# Altium PCB Power.PcbDoc
Units mm, origin at the board's own origin, x right, y up, seen from the top; angles counter-clockwise.
Board outline 152.4 x 101.6 mm, 2 copper layers (Top Layer, Bottom Layer); 31 components, 11 nets, 104 pads, 38 vias.
Unrouted connection lines stored in the file: 2.
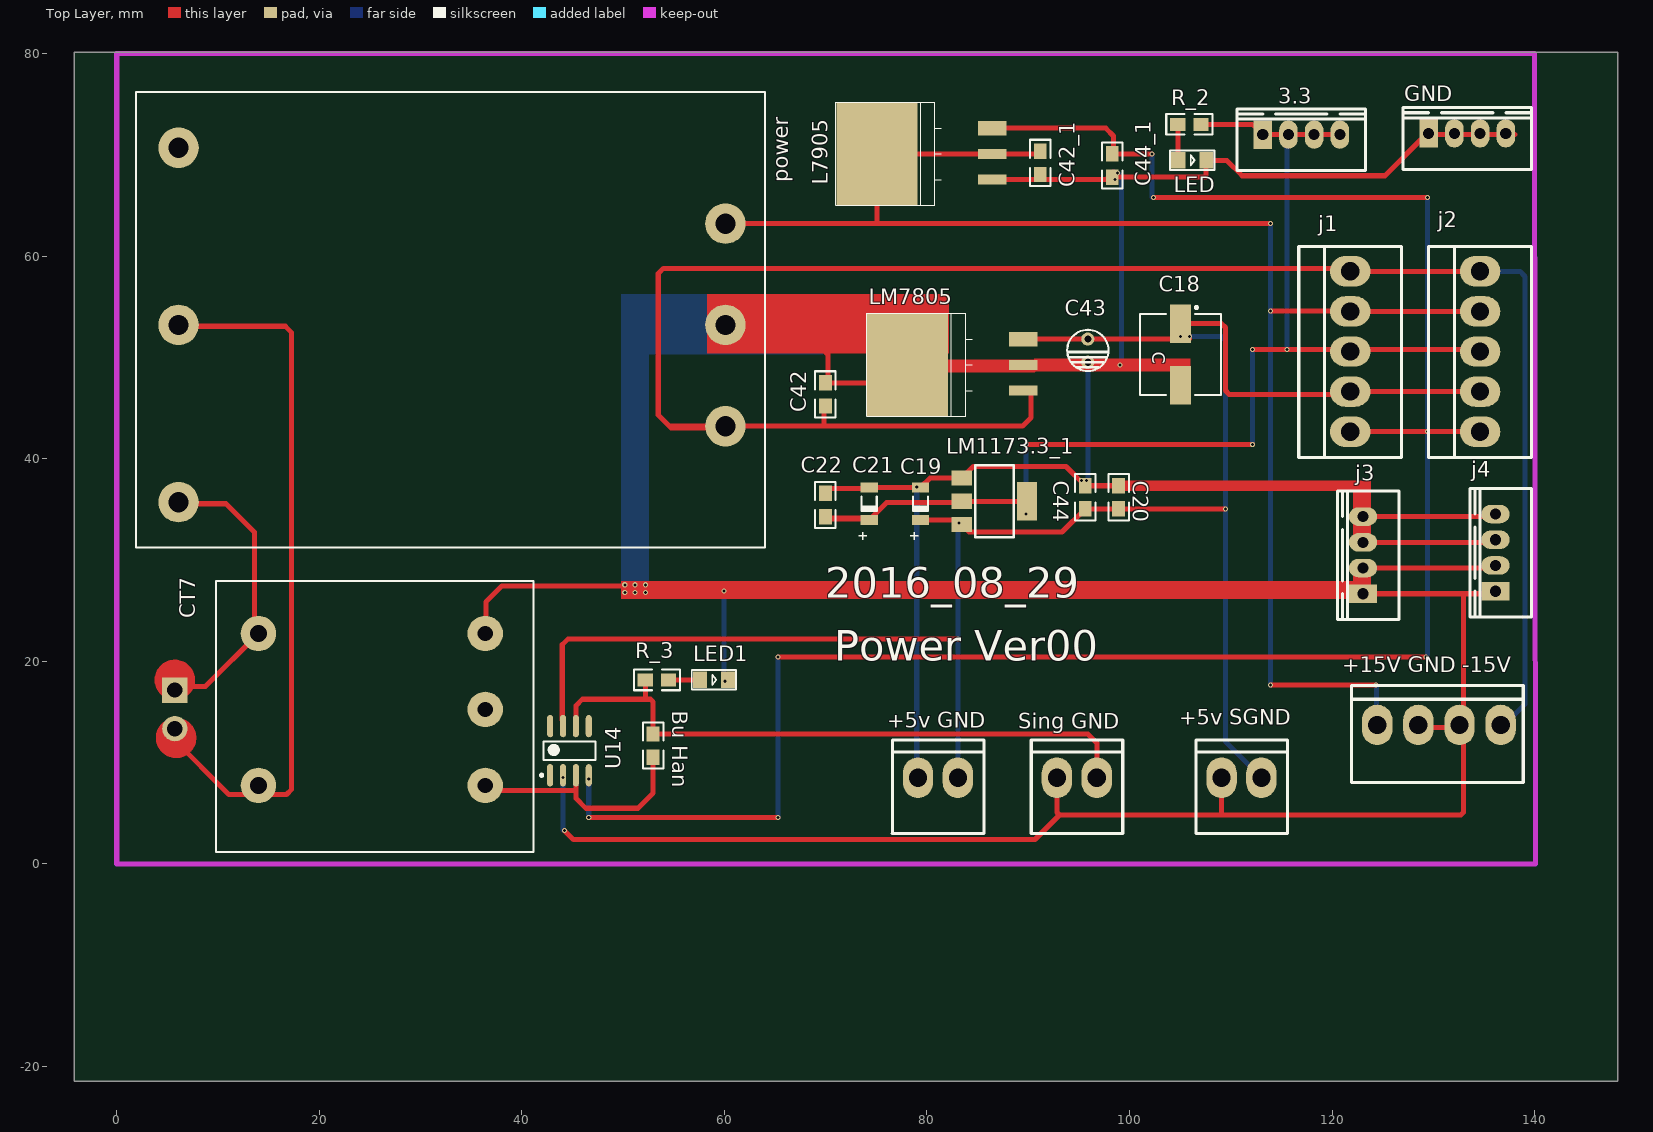
[diagram p0: Top Layer view]
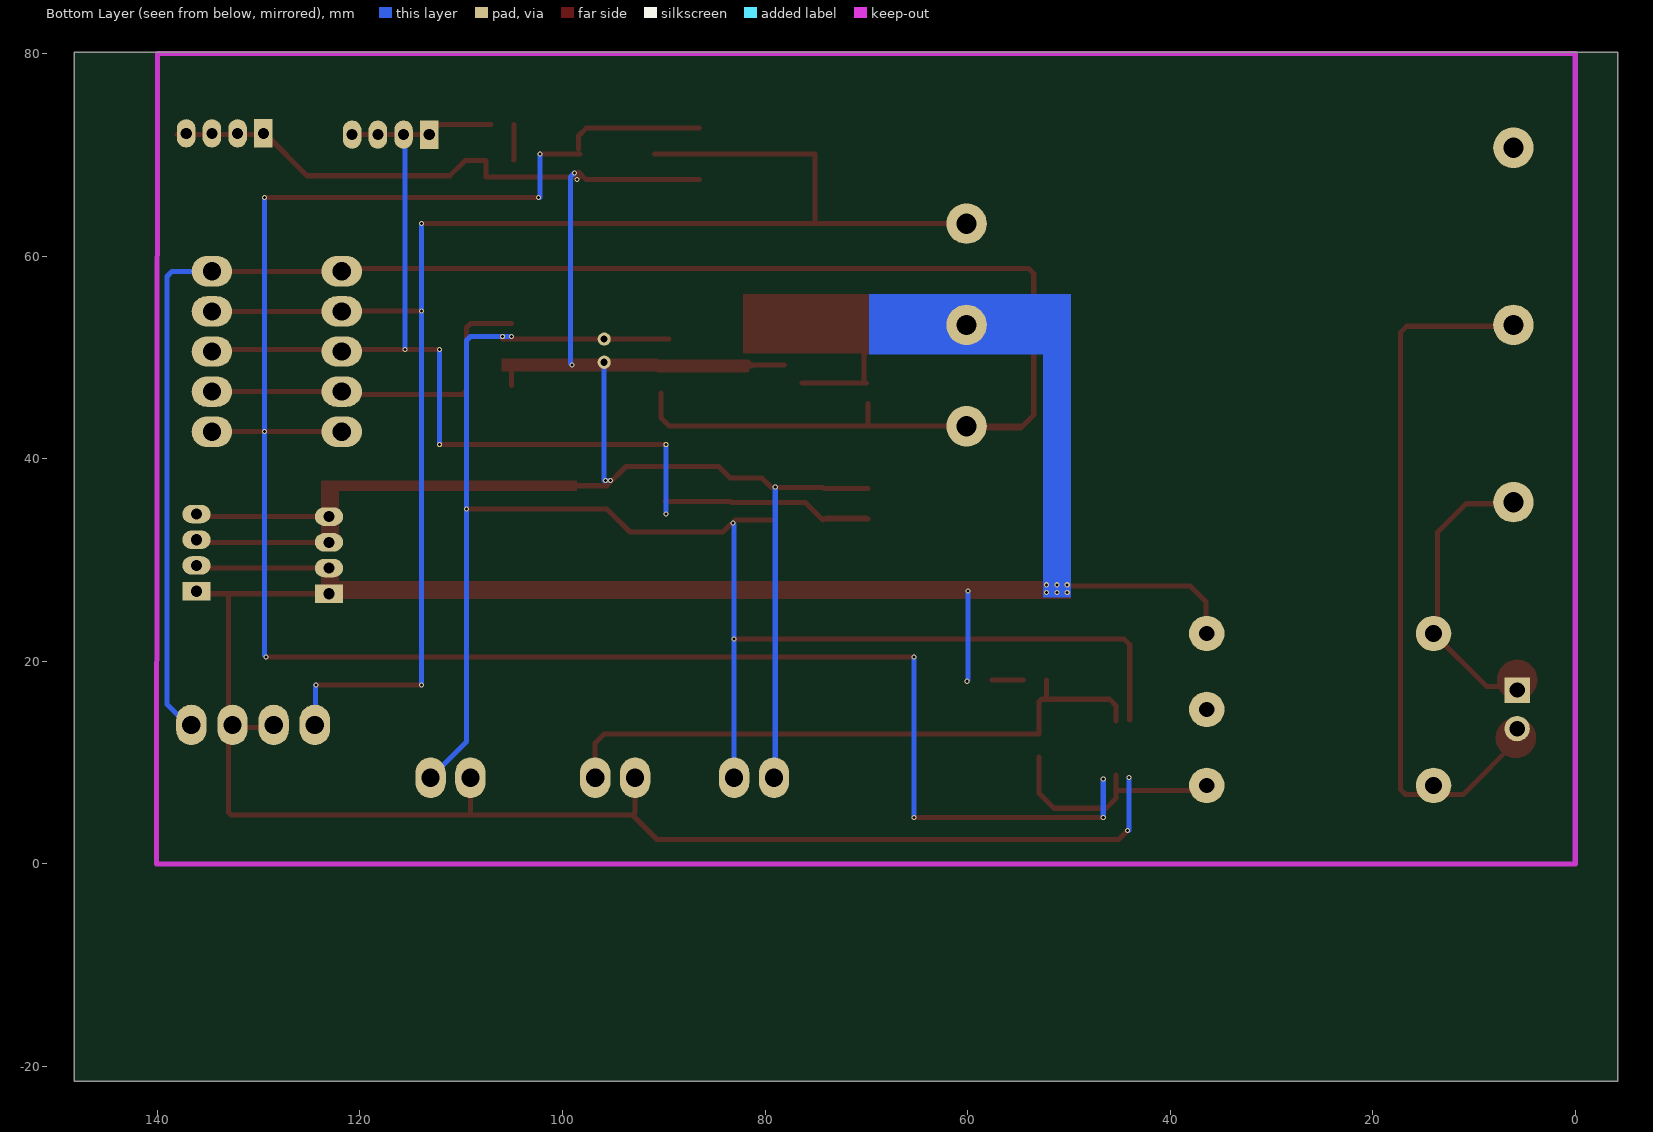
[diagram p1: Bottom Layer view, seen from below]

## Layer stack, top to bottom
Top Layer: signal copper 0.0356
Dielectric: dielectric 0.32, FR-4, Dk 4.8
Bottom Layer: signal copper 0.0356

## Board outline
-4.191,-21.463 148.209,-21.463 148.209,80.137 -4.191,80.137

## Design rules (kind name [scope] priority, off if disabled: settings)
Clearance [All] p1: gap=0.254
PolygonConnect [All] p1: connectstyle=Relief reliefconductorwidth=0.254 reliefentries=4 polygonreliefangle="90 Angle"
RoutingVias [All] p1: holewidth=0.711 width=1.27 viastyle="Through Hole" minholewidth=0.711 minwidth=1.27 maxholewidth=0.711 maxwidth=1.27
SilkscreenOverComponentPads [All] p1: minsilkscreentomaskgap=0.254
SolderMaskExpansion [All] p1: expansion=0.102
TestPointUsage [All] p1: valid=0 allowmultiple=FALSE
Testpoint [All] p1: side=15 testpointundercomponent=TRUE minsize=1.016 maxsize=2.54 preferedsize=1.524 minholesize=0 maxholesize=1.016 preferedholesize=0.813 testpointgrid=0.025 style=1023 order=0123456789
Width [All] p1: maxlimit=1 minlimit=0.2 preferedwidth=0.254 minimp=50.000000 maximp=50.000000 favimp=50.000000
23 further rules are at their usual default settings.

## Components (designator, comment, footprint, x,y, rotation, side; value= is the part's Value field where it differs from the comment)
3.3 "CON4" CON4 113.157,72.009 r0 top
"+5v GND" "CON2" CON2/0.4 79.121,8.509 r0 top
"+5v SGND" "CON2" CON2/0.4 109.093,8.509 r0 top
"+15V GND -15V" "CON4" CON4/0.4 124.46,13.716 r0 top
"Bu Han" "0K" 0805 52.959,10.541 r90 top
C18 "220u" C-RVE 105.029,50.292 r270 top
C19 "10u" c-1206 79.375,35.56 r90 top
C20 "0.1" 0805 98.933,35.052 r90 top
C21 "10u" c-1206 74.295,35.56 r90 top
C22 "0.1" 0805 69.977,34.29 r90 top
C42 "0.1" 0805 69.977,45.212 r90 top
C42_1 "0.1" 0805 91.186,68.072 r90 top
C43 "220U" CD4 95.885,51.816 r90 top
C44 "0.1" 0805 95.631,35.052 r90 top
C44_1 "0.1" 0805 98.298,70.104 r270 top
CT7 "CT09" TRA1 24.384,14.224 r270 top
GND "CON4" CON4 129.54,72.136 r0 top
j1 "CON5" CON5/0.4 121.793,42.672 r90 top
j2 "CON5" CON5/0.4 134.62,42.672 r90 top
j3 "CON4" CON4 123.063,26.67 r90 top
j4 "CON4" CON4 136.144,26.924 r90 top
L7905 "LD1086D2M33" D2PAK/A 75.057,70.104 r0 top
LED "0K" LED_贴_1 105.029,69.469 r0 top
LED1 "0K" LED_贴_1 57.785,18.161 r0 top
LM1173.3_1 "LM1117-33" SOT223 83.439,38.1 r270 top
LM7805 "LD1086D2M33" D2PAK/A 78.105,49.276 r0 top
power "Power" POWER 6.1,53.217 r180 top
R_2 "0K" 0805 107.061,73.025 r180 top
R_3 "0K" 0805 52.197,18.161 r0 top
"Sing GND" "CON2" CON2/0.4 92.837,8.509 r0 top
U14 "OP07CP" SOP127P600X175-8N 44.704,11.176 r90 top

## Footprints (in the part's own frame and the unit in brackets; to place one, negate y for a bottom-side part, rotate by r counter-clockwise, add the part's x,y. Pads: shape width x height; smd on the part's side, far side on the other; paste and mask are expansions set on the pad)
0805 [mil]
  rect 60x50 smd: 1(0,0) 2(90,0)
  silkscreen extent -45,-40 135,40
c-1206 [mm] "Chip Inductor, 2-Leads, Body 3.2x1.6mm, IPC Medium Density"
  rect 1x1.7 smd: 1(-1.6,0) 2(1.6,0)
  silkscreen extent -3.56,-0.75 0.7,1.02, body extent -1.6,-0.8 1.6,0.8, height 0.6
C-RVE [mm] "Precision Wire Wound Inductor, 2-Leads, Body 8.0x8.0mm, IPC Medium Density"
  rect 3.8x2.05 smd: 1(-3.048,0) 2(3.048,0)
  silkscreen extent -4.77,-4 4,4, body extent -4,-4 4,4, height 10.3
CD4 [mm]
  round 1.3 hole 0.7: 1(0,0) 2(-2.286,0)
  silkscreen extent -3.16,-2.04 0.92,2.04
CON2/0.4 [mm]
  oval 3x4 hole 1.8: 1(0,0) 2(3.937,0)
  silkscreen extent -2.54,-5.51 6.5,3.71
CON4 [mil]
  rect 72x110 hole 43.31: 1(0,0)
  oval 72x110 hole 43.31: 2(100,0) 3(200,0) 4(300,0)
  silkscreen extent -100,-140 400,100
CON4/0.4 [mm]
  oval 3x4 hole 1.8: 1(0,0) 2(4.064,0) 3(8.128,0) 4(12.192,0)
  silkscreen extent -2.54,-5.69 14.42,3.91
CON5/0.4 [mm]
  oval 3x4 hole 1.8: 1(0,0) 2(3.96,0) 3(7.92,0) 4(11.88,0) 5(15.84,0)
  silkscreen extent -2.54,-5.08 18.29,5.08
D2PAK/A [mm]
  rect 2.8x1 smd: 1(11.4,-2.54) 2(11.4,0)
  rect 8x10.2 smd: 2(0,0)
  rect 2.8x1.42 smd: 3(11.4,2.54)
  silkscreen extent -4.06,-5.08 6.35,5.08
LED_贴_1 [mm]
  rect 1.4x1.6 smd: 1(-0.207,0.013) 2(2.562,0.013)
  silkscreen extent -1.02,-0.94 3.37,0.98
POWER [mm]
  round 4 hole 2: 0(-54,-10) 1(-54,0) 2(-54,10) 3(0,-17.5) 4(0,0) 5(0,17.5)
  silkscreen extent -57.91,-23 4.19,22
SOP127P600X175-8N [mm] "SOP, 8-Leads, Body 5.1x4.0mm (max), Pitch 1.27mm, IPC Medium Density"
  oval 2.2x0.6 smd: 1(-2.425,1.905) 2(-2.425,0.635) 3(-2.425,-0.635) 4(-2.425,-1.905) 5(2.425,-1.905) 6(2.425,-0.635) 7(2.425,0.635) 8(2.425,1.905)
  silkscreen extent -2.55,-2.55 0.93,2.88, body extent -2,-2.55 2,2.55, height 1.75
SOT223 [mil]
  rect 59x79 smd: 1(0,0) 2(90.55,0) 3(181.1,0)
  rect 150x79 smd: 4(89.88,253.54)
  silkscreen extent -49,52 231,202
TRA1 [mm]
  rect 2.5x2.5 hole 1.5: 1(-2.934,-18.649)
  round 2.5 hole 1.5: 2(0.876,-18.649)
  round 3.5 hole 1.7: 3(-8.522,-10.394) 4(6.478,-10.394)
  round 3.5 hole 1.5: 5(-8.522,12.006) 6(6.478,12.006) 8(-1.022,12.006)
  Top Layer circle w2: c-3.934,-18.649 r1
  Top Layer circle w2: c1.781,-18.522 r1
  silkscreen extent -13.73,-14.59 13.04,16.78

## Part data
3.3 "+5v GND" "+5v SGND" "+15V GND -15V" GND j1 j2 j3 j4 "Sing GND": "Connector"
"Bu Han" LED LED1 R_2 R_3: library part Res2, "Resistor"
C18 C43: library part "CAPACITOR POL", "Capacitor"
C19 C21: library part Cap2, "Capacitor"
C20 C22: library part Cap, "Capacitor"
C42 C42_1 C44 C44_1: library part CAP, "Capacitor"
L7905 LM7805: library part LM1086
LM1173.3_1: library part LM1117
U14: library part OP07CN, "Very Low Offset Single Bipolar Operational Amplifier"

## Free pads (board coordinates)
  round 5 on Keep-Out: 2(3,3) 2(137,3)
  round 0.5 hole 0.3: 6(89.789,41.402) 7(112.141,41.402) 8(105.918,52.07)

## Via types
v1: diameter 0.5, hole 0.3, Top Layer to Bottom Layer, 38 vias

## Nets (pads, with @x,y where several pads share a name; then routed paths per layer and width w, separated by ;. In a path a pad name is that pad's centre, name@x,y a point inside that pad or via, vN(x,y) a via of type N, cw(c..) or ccw(c..) an arc to the next point about the centre after c; other vN are vias at no path point)
+5V: "+5v GND.2" "+5v SGND.2" C18.1 C19.1 C20.1 C43.1 C44.1 j1.2 j2.2 LM1173.3_1.3 LM7805.3 U14.7 | length 205.1
  Top Layer w0.5: U14.7@43.993,14.185 43.993,21.641 44.577,22.225 v1(83.058,22.225) ; C19.1 LM1173.3_1.3@82.979,33.96 ; LM1173.3_1.3 84.173,32.766 93.345,32.766 C44.1 C20.1 v1(109.474,35.052) ; LM7805.3 C43.1 C18.1@105.918,51.816 ; C18.1 109.093,53.34 109.474,52.959 109.474,46.736 109.855,46.355 j1.2@121.516,46.355 ; j1.2 j2.2@135.382,46.632
  Bottom Layer w0.5: 83.058,8.509 83.058,33.528 v1(83.185,33.655) ; v1(105.029,52.07) 109.093,52.07 109.474,51.689 v1(109.474,35.052) 109.474,12.065 113.03,8.509
+15V: "+15V GND -15V.4" C42.1 j1.5 j2.5 LM7805.1 power.2 | length 189.1
  Top Layer w0.5: 69.85,43.344 C42.1@69.85,45.466 ; LM7805.1@90.297,46.482 90.297,44.069 89.445,43.217 power.2 54.52,43.217 54.52,43.27 53.467,44.323 53.467,58.293 53.975,58.801 112.522,58.801 ; 112.776,58.801 112.522,58.801 ; j1.5@121.504,58.801 112.522,58.801 ; j1.5 j2.5@135.001,58.512
  Bottom Layer w0.5: j2.5@135.001,58.512 138.557,58.512 139.065,58.004 139.065,15.748 136.652,13.335 136.652,12.065
-5V: C44_1.1 j1.1 j2.1 L7905.3 U14.4 | length 210.3
  Top Layer w0.5: v1(46.609,4.572) v1(65.278,4.572) ; v1(65.278,20.447) v1(129.286,20.447) ; L7905.3 97.663,72.644 98.425,71.882 C44_1.1@98.425,70.612 ; C44_1.1 v1(102.235,70.104) ; v1(102.362,65.786) v1(129.413,65.786) ; j1.1 v1(129.413,42.672) j2.1@135.509,42.672
  Bottom Layer w0.5: v1(46.609,4.572) v1(46.609,8.382) ; v1(65.278,4.572) v1(65.278,20.447) ; v1@102.235,65.786 v1(102.235,70.104) ; v1(129.286,20.447) 129.413,20.574 v1(129.413,42.672) v1(129.413,65.786)
-15V: "+15V GND -15V.1" C42_1.2 j1.4 j2.4 L7905.2 power.0 | length 158.2
  Top Layer w0.5: power.0 75.057,63.217 ; C42_1.2@90.932,70.104 86.457,70.104 75.057,70.104 75.057,63.217 ; v1(113.919,17.653) v1(124.333,17.653) ; v1(113.919,54.61) j1.4@121.735,54.61 ; v1(113.919,63.217) 75.057,63.217 ; j1.4 j2.4@135.255,54.552
  Bottom Layer w0.5: v1(113.919,17.653) v1(113.919,54.61) 113.919,56.769 v1(113.919,63.217) ; v1(124.333,17.653) 124.409,17.678 124.409,13.36
GND: "+5v GND.1" C18.2 C19.2 C20.2 C21.2 C22.2 C42.2 C42_1.1 C43.2 C44.2 C44_1.2 GND.1 GND.2 GND.3 GND.4 j3.3 j3.4 j4.3 j4.4 L7905.1 LED.2 LM1173.3_1.1 LM7805.2 | length 208.3
  Top Layer w0.5: C22.2@69.85,37.084 C21.2@74.164,37.084 ; C42.2 LM7805.2@76.327,47.498 ; C21.2 C19.2 80.315,38.1 LM1173.3_1.1 84.582,39.243 93.726,39.243 C44.2 C20.2 ; LM7805.2@78.105,49.28 78.105,49.276 89.505,49.276 95.631,49.276 C43.2 104.267,49.53 105.029,48.768 C18.2 ; L7905.1 91.186,67.564 97.663,67.564 C44_1.2@98.425,68.326 ; C44_1.2 107.569,67.818 107.569,69.46 109.61,69.46 111.125,67.945 125.222,67.945 129.286,72.009 GND.4@138.049,72.009 ; j3.3 j4.3@136.271,31.75 ; j3.4 j4.4@136.271,34.29
  Bottom Layer w0.5: v1(78.994,37.211) 78.994,19.177 78.994,8.636 79.121,8.509 ; v1(95.25,37.846) v1(95.758,37.846) ; v1@95.885,37.846 95.885,47.371 C43.2 ; v1(98.823,68.218) 99.206,67.835 99.206,49.422 v1(99.06,49.276)
"NetBu Han_1": "Bu Han.1" CT7.2 U14.3 | length 15.3
  Top Layer w0.5: U14.3 45.364,8.726 45.364,6.452 ; 45.364,7.239 45.364,6.452 ; 52.959,10.541 52.959,6.985 51.466,5.492 46.324,5.492 45.364,6.452
NetLED1_1: LED1.1 R_3.2 | length 3.1
  Top Layer w0.5: R_3.2 LED1.1@57.566,18.161
NetLED_1: LED.1 R_2.2 | length 3.6
  Top Layer w0.5: R_2.2 104.775,69.529 LED.1
SGND: "+5v SGND.1" "+15V GND -15V.2" "+15V GND -15V.3" "Sing GND.1" CT7.1 j3.1 j3.2 j4.1 j4.2 LED1.2 power.1 U14.2 | length 206.9
  Top Layer w0.5: v1(44.196,3.302) 45.085,2.413 90.678,2.413 93.091,4.826 ; 78.736,53.217 power.1 60.1,54.512 61.595,56.007 81.915,56.007 ; 92.837,8.509 92.837,5.08 93.091,4.826 ; 109.093,8.509 109.093,4.826 ; j3.1 133.223,26.67 ; j3.2 j4.2@136.271,29.21 ; 128.651,13.462 133.223,13.462 ; j4.1@136.271,26.67 133.223,26.67 ; 93.091,4.826 109.093,4.826 ; 109.093,4.826 132.715,4.826 132.969,5.08 132.969,9.779 132.969,26.416 133.223,26.67
  Bottom Layer w0.5: v1@44.069,3.302 v1(44.069,8.509) ; v1(59.944,26.924) 59.944,18.161 v1(60.071,18.034)
  other v1: 50.165,26.797 51.181,26.797 52.197,26.797 50.165,27.559 51.181,27.559 52.197,27.559
SING: "Bu Han.2" "Sing GND.2" R_3.1 U14.6 | length 62.1
  Top Layer w0.5: U14.6@45.339,14.122 45.339,15.621 45.974,16.256 52.705,16.256 52.959,16.002 52.959,12.827 95.885,12.827 96.774,11.938 96.774,8.509 ; 52.197,16.383 R_3.1
VDD33: 3.3.1 3.3.2 3.3.3 3.3.4 C21.1 C22.1 j1.3 j2.3 LM1173.3_1.2 LM1173.3_1.4 pad.6 pad.7 R_2.1 | length 117.9
  Top Layer w0.254: C22.1 73.965,34.29 C21.1
  Top Layer w0.5: C21.1 76.022,35.687 83.326,35.687 LM1173.3_1.2 LM1173.3_1.4@89.862,35.8 ; pad.6 pad.7 ; R_2.1 112.141,73.025 3.3.1 3.3.2 3.3.3 3.3.4 ; v1(112.141,50.8) v1(115.57,50.8) j2.3@135.255,50.8
  Bottom Layer w0.5: v1(89.789,34.544) 89.789,38.481 pad.6 ; pad.7 v1(112.141,50.8) ; v1(115.57,50.8) 115.57,71.882 3.3.2
  other v1: 112.141,50.8 115.57,50.8
pads on no net: CT7.3 CT7.4 CT7.5 CT7.6 CT7.8 power.3 power.4 power.5 U14.1 U14.5 U14.8
copper on no net: | length 195
  Top Layer w0.2: 36.39,7.076 36.39,7.746 36.39,7.076
  Top Layer w0.5: 5.334,17.526 8.769,17.526 13.99,22.746 ; 5.48,12.446 11.068,6.858 12.492,6.858 15.34,6.858 16.764,6.858 17.272,7.366 17.272,52.451 16.637,53.086 6.23,53.086 6.1,53.217 ; 5.715,35.56 10.795,35.56 13.589,32.766 13.589,22.225 ; 36.449,22.987 36.449,25.854 38.027,27.432 49.276,27.432 51.435,27.432 51.562,27.305 ; 36.576,7.239 45.364,7.239 ; 53.975,58.801 53.721,58.547 53.467,58.293 53.467,44.323 54.737,43.053 59.944,43.053 ; 60.833,53.34 67.183,53.34 70.231,50.292 70.231,47.879 ; 69.85,34.036 72.39,34.036 74.422,34.036 ; 81.28,49.149 89.154,49.149 ; 81.661,49.53 90.551,49.53 ; 81.788,48.768 90.551,48.768
  other v1: 98.552,67.564

## Keep-outs
Keep-Out Layer:
  lines w0.5: 0,0 140.081,0 139.997,80.01 0,80.01 0,0

## Other copper
Top Layer:
  rectangle net SGND: 122.047,26.416 123.825,29.464
  rectangle net SGND: 49.784,26.162 123.698,27.94
  rectangle net GND: 122.047,31.75 123.825,37.719
  rectangle net GND: 98.552,36.83 123.825,37.846
  rectangle net GND: 90.551,48.641 106.045,49.911
  rectangle: 58.293,50.419 82.169,56.261
Bottom Layer:
  rectangle net SGND: 49.784,26.289 52.578,56.261
  rectangle net SGND: 49.784,50.292 69.723,56.261

## Silkscreen, mask and mechanical layers (free items; w line width, h text height)
Top Overlay:
  text "2016_08_29" at 69.977,26.289 h3
  text "Power Ver00" at 70.866,20.066 h3

## Text inside footprints (layer, text, board x,y; h text height)
C18: Top Overlay "C" at 102.235,50.546 h1.27 r270